# Altium PCB 矩形板V5.0.pcbdoc (part 2 of 2)
Units mm, origin at the board's own origin, x right, y up, seen from the top; angles counter-clockwise.
Board outline 153.79 x 190.97 mm, 2 copper layers (Top Layer, Bottom Layer); 169 components, 219 nets, 720 pads, 293 vias.
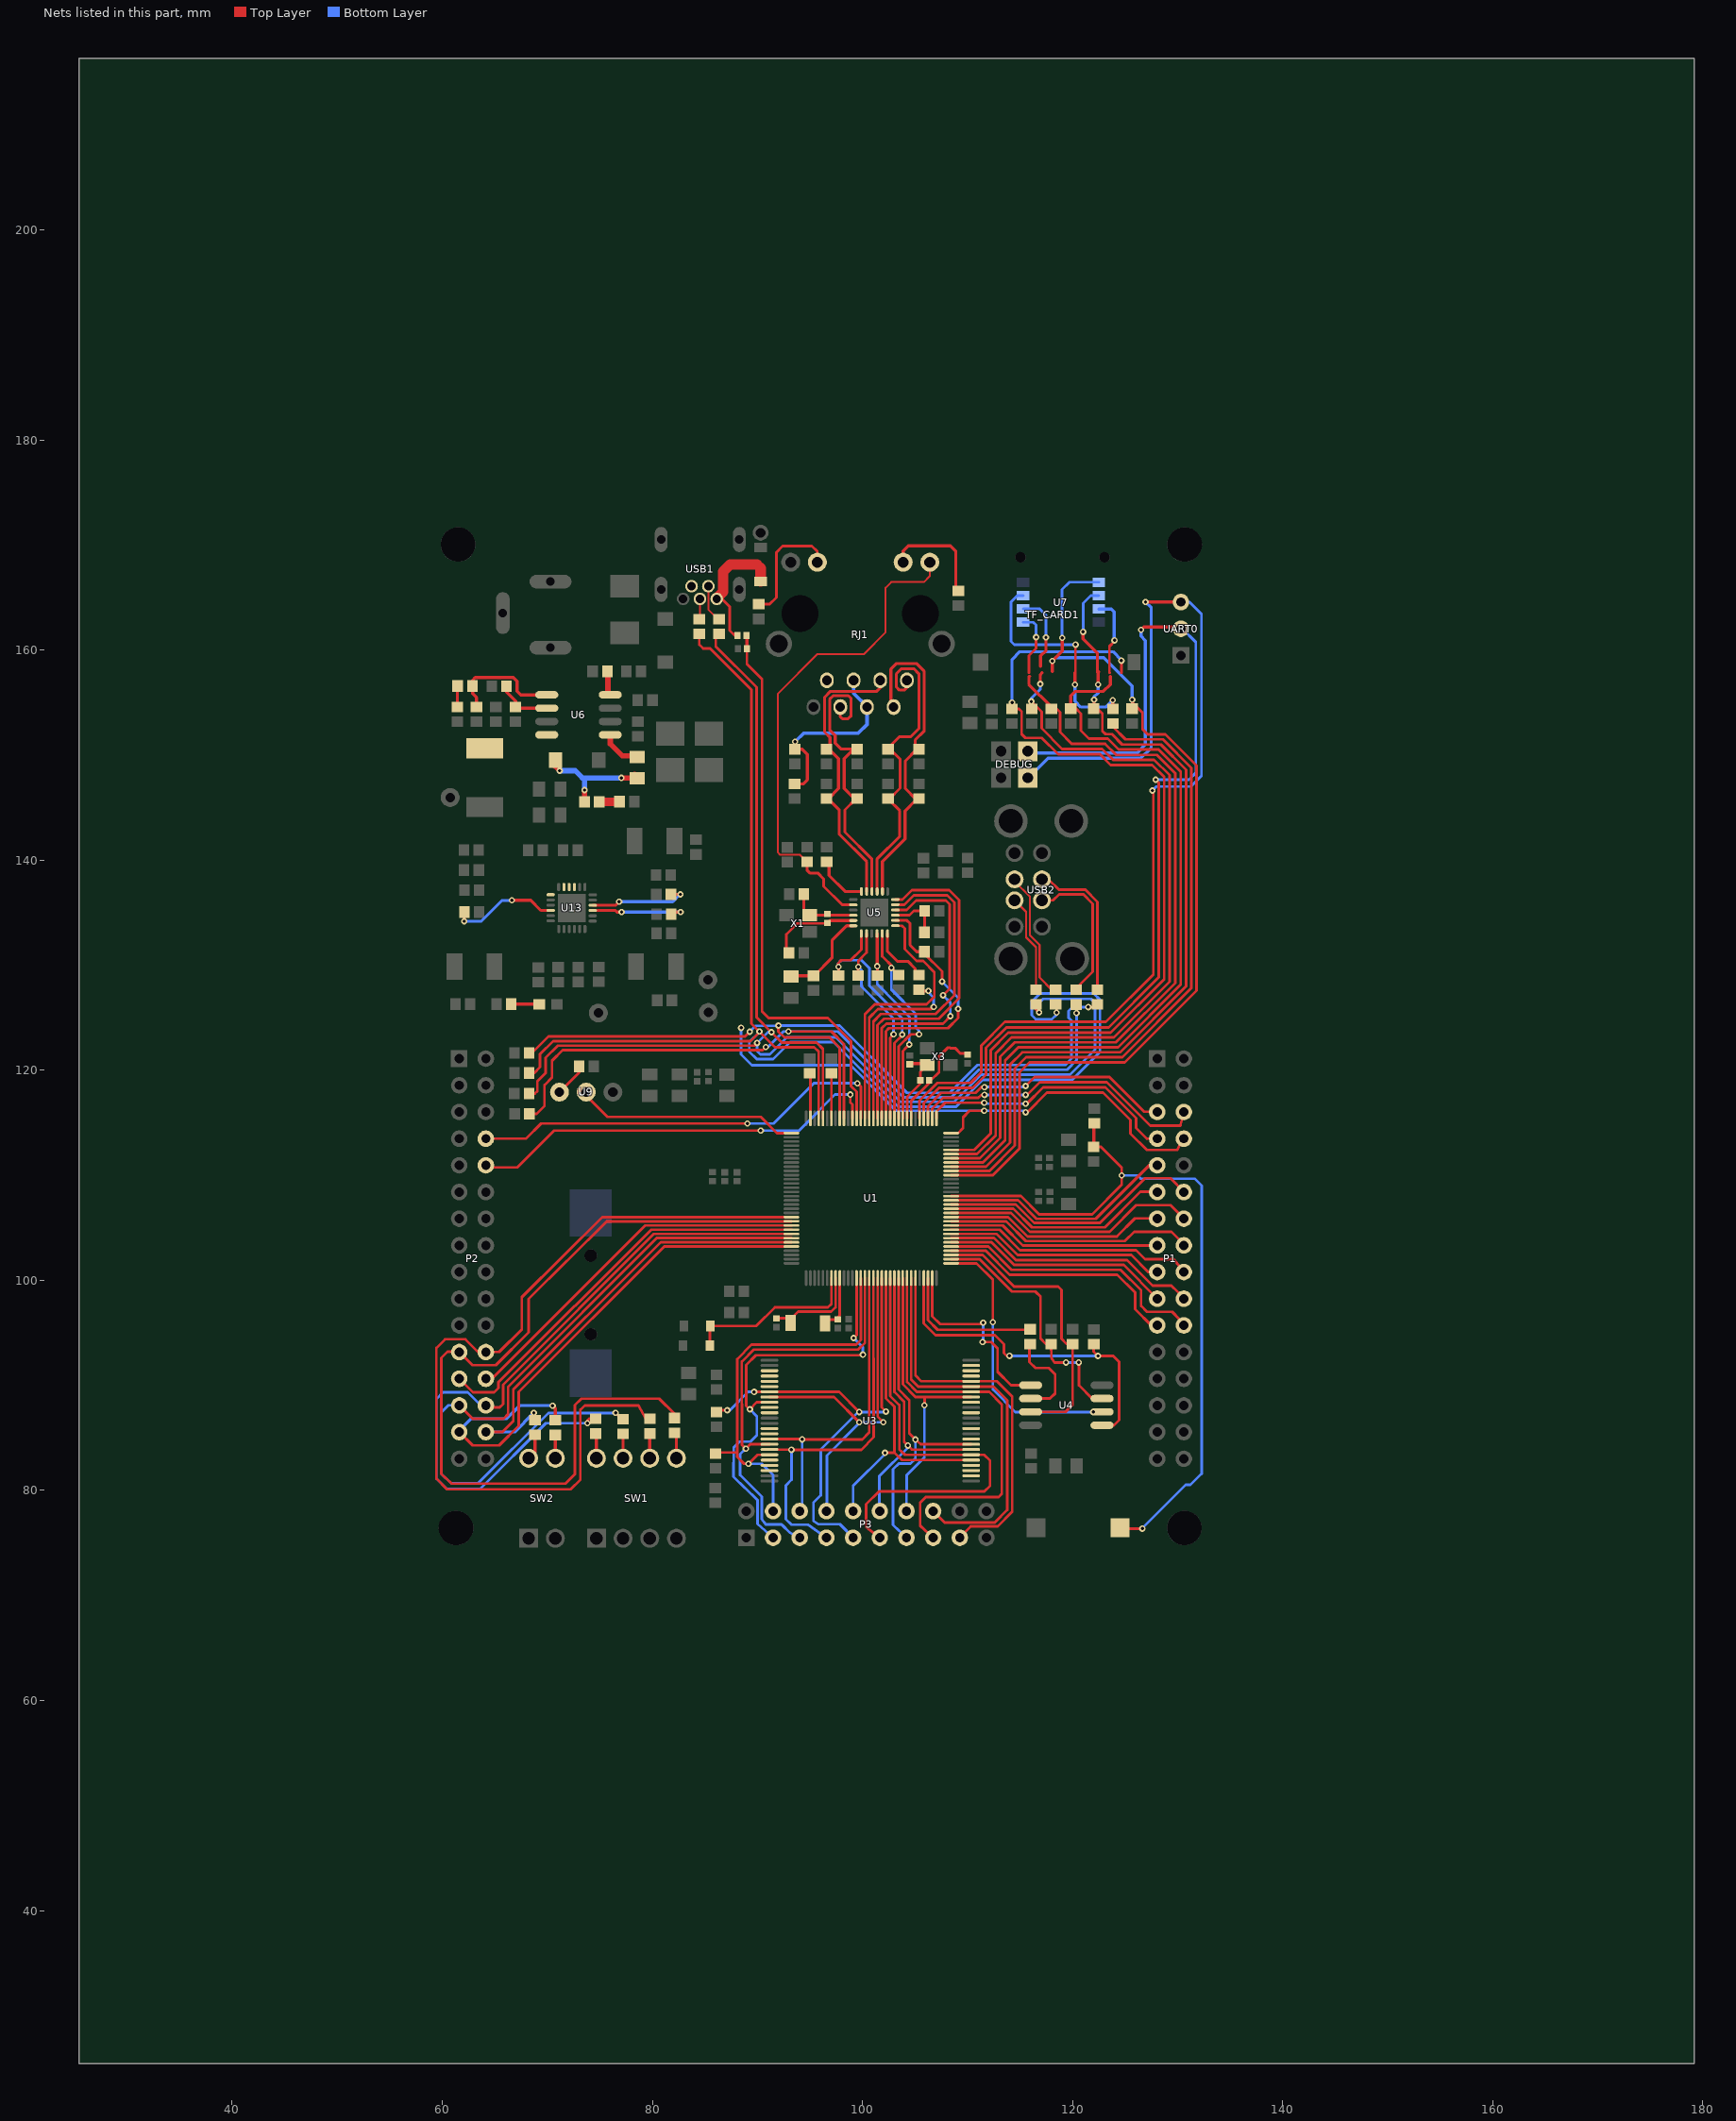
[diagram p2: the nets of this part, all layers, seen from the top]

## Via types
v1: diameter 0.61, hole 0.305, Top Layer to Bottom Layer, 293 vias

## Nets (pads, with @x,y where several pads share a name; then routed paths per layer and width w, separated by ;. In a path a pad name is that pad's centre, name@x,y a point inside that pad or via, vN(x,y) a via of type N, cw(c..) or ccw(c..) an arc to the next point about the centre after c; other vN are vias at no path point) (continued)
PC1: P3.3 U1.45 U3.9 | length 41.5
  Top Layer w0.25: U3.9@91.151,88.389 89.932,88.389 v1(89.287,87.726) 88.941,88.031 88.935,91.939 89.852,92.868 99.98,92.868 v1(100.041,92.929) ; v1(99.161,94.509) 99.443,94.792 U1.45@99.443,100.226
  Bottom Layer w0.25: v1(89.287,87.726) 89.95,87.058 89.95,85.247 89.342,84.64 88.311,84.64 87.74,84.068 87.732,81.305 90.021,79.072 90.021,76.814 P3.3@91.491,75.489 ; v1(99.161,94.509) 100.041,93.629 v1(100.041,92.929)
PC2: P3.4 R29.2 U1.46 U3.19 | length 39.8
  Top Layer w0.25: R29.2@85.896,83.619 88.032,83.619 ; U3.19@91.151,83.389 90.009,83.389 v1(89.149,82.529) 88.73,82.529 88.07,83.19 88.07,92.499 89.442,93.868 99.391,93.868 99.843,94.32 U1.46@99.843,100.225
  Bottom Layer w0.25: v1(89.149,82.529) 90.43,82.529 91.491,81.47 P3.4@91.491,78.029
PC3: P3.5 U1.47 U3.17 | length 41.6
  Top Layer w0.25: v1(88.896,83.964) 88.527,84.333 88.514,92.252 89.67,93.408 99.602,93.408 100.244,94.048 U1.47@100.244,100.225 ; v1(88.896,83.964) 89.321,84.389 U3.17@91.151,84.389
  Bottom Layer w0.25: v1(88.896,83.964) 88.36,83.446 88.36,81.46 90.412,79.408 90.412,77.244 90.795,76.756 92.291,76.758 92.373,76.687 93.061,75.999 93.914,75.488 P3.5@94.031,75.489
PC4: P3.6 U1.48 U3.16 | length 31.4
  Top Layer w0.25: U3.16@91.151,84.889 94.221,84.889 v1(94.251,84.859) ; v1@94.25,84.858 99.98,84.858 100.643,85.521 U1.48@100.643,100.225
  Bottom Layer w0.25: P3.6@94.031,78.029 94.251,78.249 v1(94.251,84.859)
PC5: P3.7 U1.49 U3.18 | length 36.9
  Top Layer w0.25: U3.18@91.151,83.889 93.221,83.889 v1(93.241,83.869) 99.894,83.868 101.06,85.064 U1.49@101.044,100.223
  Bottom Layer w0.25: v1(93.241,83.869) 93.241,81.01 92.7,80.469 92.7,77.269 93.244,76.736 94.809,76.741 P3.7@96.571,75.489
PC6: P3.8 U1.50 U3.8 | length 35.5
  Top Layer w0.25: U3.8@91.151,88.889 97.3,88.889 v1(99.7,86.49) ; U1.50@101.442,100.226 101.442,87.033 v1(101.986,86.49)
  Bottom Layer w0.25: P3.8@96.571,78.029 96.611,78.069 96.611,83.329 99.7,86.418 v1(99.7,86.49) v1(101.986,86.49)
PC7: P3.9 R28.1 U1.51 U3.7 | length 47.3
  Top Layer w0.25: R28.1@86.111,87.444 86.3,87.633 v1(87.127,87.633) ; U3.7@91.151,89.389 97.772,89.389 v1(99.7,87.462) ; U1.51@101.844,100.226 101.844,87.902 v1(102.24,87.506)
  Top Layer w0.3: v1(89.691,89.379) 89.701,89.389 U3.7@91.151,89.389
  Bottom Layer w0.25: v1(87.127,87.633) 87.381,87.633 89.127,89.379 v1(89.691,89.379) ; P3.9@99.111,75.489 97.857,76.779 95.792,76.779 95.332,77.099 95.332,78.818 96.04,79.53 96.04,83.908 99.594,87.462 v1(99.7,87.462) ; v1(99.7,87.462) 102.196,87.462 v1(102.24,87.506)
PC8: P3.10 U1.52 U3.29 | length 32.3
  Top Layer w0.25: v1(102.151,83.579) 103.051,83.579 ; U1.52@102.243,100.225 102.243,88.773 103.051,87.965 103.051,83.578 ; U3.29@110.351,82.89 103.749,82.89 103.051,83.578
  Bottom Layer w0.25: P3.10@99.111,78.029 99.111,80.429 102.151,83.468 v1(102.151,83.579)
PC9: P3.11 U1.53 U3.30 | length 44.5
  Top Layer w0.25: P3.11@101.651,75.489 100.361,76.52 100.361,78.679 101.588,79.908 111.608,79.908 112.152,80.449 112.152,82.829 111.59,83.388 U3.30@110.351,83.389 104.059,83.388 103.511,83.911 103.511,88.14 102.644,88.996 U1.53@102.644,100.225
PC10: P3.12 U1.54 U3.31 | length 30.1
  Top Layer w0.25: U1.54@103.043,100.225 103.043,89.369 103.97,88.44 103.97,84.629 v1(104.331,84.269) 104.711,83.889 U3.31@110.351,83.889
  Bottom Layer w0.25: P3.12@101.651,78.029 101.611,78.069 101.611,81.368 104.331,84.089 v1(104.331,84.269)
PC11: P3.13 U1.55 U3.32 | length 32.9
  Top Layer w0.25: U1.55@103.445,100.225 103.439,89.606 104.461,88.587 104.461,85.419 v1(105.041,84.839) ; v1@105.04,84.838 105.548,84.389 U3.32@110.351,84.389
  Bottom Layer w0.25: P3.13@104.191,75.489 102.921,76.728 102.921,82.009 103.47,82.56 104.57,82.56 105.041,83.031 v1(105.041,84.839)
PC12: P3.14 U1.56 U3.41 | length 28.7
  Top Layer w0.25: U1.56@103.843,100.226 103.843,90.094 105.047,88.889 U3.41@110.351,88.889 ; v1(105.901,88.109) 105.912,88.12 105.912,88.889
  Bottom Layer w0.25: P3.14@104.191,78.029 104.212,81.45 105.901,83.139 v1(105.901,88.109)
PC13: P3.15 U1.57 U3.42 | length 40.3
  Top Layer w0.25: U1.57@104.244,100.226 104.244,90.327 105.182,89.389 U3.42@110.351,89.389 ; P3.15@106.731,75.489 105.492,76.639 105.492,78.818 106.028,79.359 112.97,79.359 113.269,79.669 113.272,88.186 112.07,89.39 U3.42@110.351,89.39
PC14: P3.16 U1.58 U3.43 | length 38.1
  Top Layer w0.25: U1.58@104.643,100.226 104.643,90.564 105.318,89.889 U3.43@110.351,89.889 ; P3.16@106.731,78.029 107.831,76.939 112.591,76.939 113.79,78.138 113.79,88.569 112.472,89.888 U3.43@110.351,89.889
PC15: P3.17 U1.59 U3.44 | length 36.3
  Top Layer w0.25: U1.59@105.045,100.225 105.045,90.967 105.623,90.389 U3.44@110.351,90.389 112.82,90.388 114.25,88.961 114.25,77.947 112.871,76.568 110.308,76.568 P3.17@109.231,75.488
PD8: P1.21 U1.68 | length 23.5
  Top Layer w0.254: U1.68@108.441,102.819 111.743,102.819 114.021,100.538 124.25,100.538 125.972,98.844 125.969,97.241 127.511,95.699 P1.21@128.047,95.699
PD9: P1.22 U1.69 | length 26.3
  Top Layer w0.254: U1.69@108.441,103.22 111.982,103.22 114.201,100.998 124.572,100.998 126.531,99.039 126.531,97.548 127.082,97 129.49,97 P1.22@130.711,95.709
PD10: P1.19 U1.70 | length 21.9
  Top Layer w0.254: U1.70@108.441,103.619 112.281,103.619 114.44,101.46 124.88,101.46 P1.19@128.061,98.249
PD11: P1.20 U1.71 | length 24.6
  Top Layer w0.254: U1.71@108.441,104.02 112.52,104.02 114.621,101.92 125.2,101.92 127.62,99.491 129.401,99.489 P1.20@130.711,98.249
PD12: P1.17 U1.72 | length 21.2
  Top Layer w0.254: U1.72@108.441,104.419 112.799,104.399 114.781,102.42 125.588,102.42 127.204,100.789 P1.17@128.171,100.789
PD13: P1.18 U1.73 | length 23.9
  Top Layer w0.254: U1.73@108.441,104.82 113.061,104.82 115.002,102.88 126.051,102.88 126.912,102.019 129.632,102.019 P1.18@130.6,100.789
PD14: P1.15 U1.74 | length 20.4
  Top Layer w0.254: U1.74@108.441,105.219 113.361,105.219 115.261,103.319 P1.15@128.061,103.329
PD15: P1.16 U1.75 | length 24
  Top Layer w0.254: U1.75@108.441,105.62 113.681,105.618 115.56,103.738 124.971,103.738 125.863,104.63 129.424,104.63 P1.16@130.711,103.329
PE10: P2.8 U1.115 | length 41
  Top Layer w0.254: P2.8@64.161,113.499 67.991,113.51 69.41,114.929 v1(89.051,114.929) ; v1(99.521,118.759) 99.84,118.439 U1.115@99.84,115.42
  Bottom Layer w0.254: v1(89.051,114.929) 91.557,114.929 95.387,118.759 v1(99.521,118.759)
PE11: R68.1 R69.2 U1.116 | length 53.6
  Top Layer w0.254: R69.2@89.005,160.139 89.005,158.666 90.44,157.228 90.44,125.608 91.07,124.978 96.701,124.978 98.921,122.758 98.921,118.478 99.442,117.957 U1.116@99.441,115.418
  Top Layer w0.28: R68.1@88.965,161.389 89.005,161.349 R69.2@89.005,160.139
PE12: P2.10 U1.117 | length 40.2
  Top Layer w0.254: P2.10@63.831,110.749 67.14,110.749 70.651,114.259 v1(90.321,114.259) ; v1(98.841,117.689) 98.841,116.94 99.04,116.741 U1.117@99.04,115.42
  Bottom Layer w0.254: v1(90.321,114.259) 93.965,114.259 97.395,117.689 v1(98.841,117.689)
PF7: P1.8 U1.96 | length 56.1
  Top Layer w0.254: U1.96@108.441,114.02 109.101,114.02 109.581,114.498 109.581,115.519 110.201,116.139 v1(111.591,116.139) ; v1@115.54,115.999 115.571,115.968 115.67,115.968 117.57,117.868 122.911,117.868 125.522,115.257 125.52,113.959 127.072,112.41 129.98,112.41 130.473,113.489 P1.8@130.6,113.489
  Bottom Layer w0.25: v1(88.451,124.039) 88.451,121.508 89.48,120.479 98.86,120.479 103.201,116.139 v1(111.591,116.139) 115.401,116.139 v1@115.541,115.999
  other v1: 115.541,115.999
PF8: P1.7 U1.97 | length 25.3
  Top Layer w0.254: U1.97@107.041,115.42 107.041,116.07 107.88,116.909 v1(111.591,116.909) ; v1@115.54,116.819 115.652,116.819 117.191,118.358 123.13,118.358 126.051,115.437 126.051,114.518 127.087,113.482 P1.7@128.07,113.489
  Bottom Layer w0.254: v1(111.591,116.909) 111.681,116.819 v1@115.541,116.819
  other v1: 115.541,116.819
PF9: P1.6 U1.98 | length 28.7
  Top Layer w0.254: U1.98@106.64,115.399 106.64,116.349 107.669,117.378 111.021,117.378 111.302,117.659 v1(111.621,117.659) ; v1@115.54,117.66 115.682,117.66 116.881,118.859 123.272,118.859 127.392,114.739 130.264,114.739 P1.6@130.653,116.067
  Bottom Layer w0.254: v1(111.621,117.659) v1@115.541,117.659
  other v1: 115.541,117.659
PF10: P1.5 U1.99 | length 25.5
  Top Layer w0.254: U1.99@106.241,115.42 106.241,116.58 107.521,117.858 110.8,117.858 111.341,118.399 v1(111.621,118.399) ; v1@115.54,118.498 116.401,119.359 123.511,119.359 126.81,116.06 P1.5@128.06,116.06
  Bottom Layer w0.254: v1(111.621,118.399) 115.441,118.399 v1@115.541,118.499
  other v1: 115.541,118.499
PG0: P2.29 R18.1 U1.28 | length 53.7
  Top Layer w0.254: P2.29@61.621,85.559 62.891,84.289 65.411,84.289 67.28,86.159 67.28,89.38 81.136,103.22 U1.28@93.241,103.22
  Top Layer w0.3: v1(70.501,88.069) 70.751,87.819 R18.1@70.751,86.679
  Bottom Layer w0.3: P2.29@61.291,85.349 62.772,86.829 66.132,86.829 67.384,88.082 v1(70.501,88.069)
PG1: P2.30 R19.1 U1.27 | length 44.4
  Top Layer w0.254: P2.30@64.161,85.559 65.731,85.559 66.762,86.588 66.762,89.621 80.813,103.619 U1.27@93.241,103.619
  Top Layer w0.3: v1(68.711,87.389) 68.711,86.799 R19.1@68.821,86.689
  Bottom Layer w0.3: P2.30@64.161,85.559 66.881,85.559 v1(68.711,87.389)
PG3: P2.27 R61.1 U1.26 | length 69.3
  Top Layer w0.254: P2.27@61.621,88.099 62.891,86.829 65.83,86.829 66.262,87.256 66.259,89.847 80.414,104.02 U1.26@93.241,104.02 ; v1(76.501,87.389) 77.101,86.789 R61.1@77.201,86.789
  Bottom Layer w0.25: P2.27@61.621,88.11 60.6,88.11 59.922,87.429 59.922,81.554 60.839,80.66 63.391,80.66 70.099,87.368 v1@76.5,87.368
PG5: P2.28 R60.1 U1.25 | length 68.7
  Top Layer w0.254: P2.28@63.831,87.889 65.461,87.889 65.792,88.219 65.792,90.058 80.125,104.419 U1.25@93.241,104.419 ; v1(73.811,86.399) 73.811,86.619 74.001,86.809 R60.1@74.591,86.809
  Bottom Layer w0.25: P2.28@63.831,87.889 63.871,87.889 62.431,89.329 60.069,89.329 59.442,88.696 59.442,81.114 60.435,80.129 63.592,80.129 69.861,86.398 v1(73.811,86.399)
PG6: P2.25 U1.24 | length 38.9
  Top Layer w0.254: P2.25@61.621,90.639 62.911,89.349 64.953,89.349 65.332,89.733 65.332,90.302 79.919,104.82 U1.24@93.241,104.82
PG7: P2.26 U1.23 | length 35.1
  Top Layer w0.254: P2.26@64.161,90.639 64.74,90.639 79.322,105.219 U1.23@93.241,105.219
PG8: P2.23 R62.1 U1.22 | length 83.4
  Top Layer w0.254: P2.23@61.621,93.179 62.881,91.92 65.101,91.92 68.22,95.036 68.22,98.221 75.657,105.62 U1.22@93.241,105.62 ; P2.23@61.621,93.2 60.491,93.2 59.922,92.628 59.922,81.579 60.882,80.642 71.74,80.65 72.632,81.541 72.632,88.13 73.241,88.74 80.651,88.74 82.101,87.289 R62.1@82.101,86.889
PG9: P2.24 R63.1 U1.21 | length 83.2
  Top Layer w0.25: P2.24@64.161,93.169 63.429,93.169 62.21,94.389 60.254,94.389 59.442,93.578 59.442,81.117 60.453,80.109 72.231,80.109 73.15,81.028 73.15,87.678 73.561,88.089 78.672,88.089 79.391,86.809 R63.1@79.761,86.809
  Top Layer w0.254: P2.24@64.161,93.179 65.418,93.179 67.575,95.323 67.567,98.389 75.23,106.019 U1.21@93.5,106.019
PG11: P1.13 U1.76 | length 21.1
  Top Layer w0.254: U1.76@108.441,106.019 113.881,106.019 115.72,104.178 124.225,104.178 125.946,105.899 P1.13@128.061,105.899
PG12: P1.14 U1.77 | length 24.5
  Top Layer w0.254: U1.77@108.441,106.42 114.141,106.42 115.941,104.62 123.521,104.62 126.061,107.16 129.34,107.16 P1.14@130.6,105.9
PG13: P1.11 U1.78 | length 21.8
  Top Layer w0.254: U1.78@108.441,106.819 114.359,106.819 116.139,105.039 123.071,105.039 126.47,108.44 P1.11@128.06,108.44
PG14: P1.12 U1.79 | length 25.2
  Top Layer w0.254: U1.79@108.441,107.221 114.58,107.218 116.34,105.458 122.611,105.458 126.894,109.72 129.32,109.72 P1.12@130.6,108.44
PG15: P1.9 U1.80 | length 22.5
  Top Layer w0.254: U1.80@108.441,107.619 114.821,107.619 116.559,105.859 122.21,105.859 127.331,110.98 P1.9@128.06,110.98
R9_2: LED1.1 R9.2 | length 2.7
  Top Layer w0.3: R9.2@66.561,126.299 69.149,126.299 LED1.1@69.228,126.38
R11_2: R11.2 U13.10 | length 9.8
  Top Layer w0.28: U13.10@74.318,135.703 76.495,135.703 v1@76.841,136.049
  Top Layer w0.3: R11.2@81.771,136.448 82.06,136.738 v1@82.67,136.748
  Bottom Layer w0.28: v1(76.841,136.049) 81.941,136.05 82.642,136.748 v1@82.67,136.748
  other v1: 82.671,136.749
R22_1: R22.1 R44.2 | length 2.2
  Top Layer w0.3: R22.1@61.432,154.599 61.432,156.75 R44.2@61.491,156.809
R57_1: C58.2 R57.1 | length 1.8
  Top Layer w0.8: R57.1@75.03,145.559 C58.2@76.81,145.559
R60_2: R60.2 SW1.8 | length 2.4
  Top Layer w0.3: R60.2@74.591,85.409 74.671,85.329 SW1.8@74.671,83.059
R61_2: R61.2 SW1.7 | length 2.3
  Top Layer w0.3: R61.2@77.201,85.389 77.201,83.069 SW1.7@77.211,83.059
R62_2: R62.2 SW1.5 | length 2.5
  Top Layer w0.3: R62.2@82.101,85.489 82.291,85.299 SW1.5@82.291,83.059
R63_2: R63.2 SW1.6 | length 2.4
  Top Layer w0.3: SW1.6@79.751,83.059 79.751,85.399 R63.2@79.761,85.409
R73_2: R73.2 U13.9 | length 9.4
  Top Layer w0.28: U13.9@74.318,135.205 76.495,135.204 76.64,135.059 v1(77.071,135.059)
  Top Layer w0.3: R73.2@81.791,134.869 81.981,135.059 v1(82.691,135.059)
  Bottom Layer w0.28: v1(77.071,135.059) v1(82.691,135.059)
R74_1: R74.1 U13.22 | length 10.3
  Top Layer w0.28: v1@66.63,136.179 68.421,136.179 69.381,135.219 U13.22@70.318,135.22
  Top Layer w0.3: v1(62.091,134.189) R74.1@62.101,135.059
  Bottom Layer w0.28: v1(62.091,134.189) 63.711,134.189 65.701,136.179 v1(66.631,136.179)
RESET: C50.2 R64.1 SW3.2 U1.81 | length 71
  Top Layer w0.254: U1.81@108.441,108.021 115.09,108.021 116.82,106.288 121.862,106.288 124.681,109.107 v1(124.681,109.989) 124.681,110.729 122.703,112.707 R64.1@122.017,112.708 ; SW3.2@124.511,76.429 124.581,76.359 v1(126.641,76.359)
  Top Layer w0.3: R64.1@122.017,112.708 122.017,114.908 C50.2@122.067,114.958
  Bottom Layer w0.25: v1(124.681,109.989) 126.191,109.989 126.501,109.679 131.641,109.679 132.291,109.029 132.291,81.569 132.261,81.569 131.221,80.529 130.771,80.529 126.641,76.399 v1(126.641,76.359)
RJ1_4: C42.1 R17.1 RJ1.4 RJ1.5 | length 18.1
  Top Layer w0.279: C42.1@93.571,150.569 93.591,150.589 v1(93.591,151.279)
  Top Layer w0.3: R17.1@93.541,147.259 94.351,147.259 94.75,147.66 94.75,150.088 94.27,150.568 C42.1@93.571,150.569
  Bottom Layer w0.35: v1@93.589,151.279 94.4,152.09 99.602,152.09 100.425,152.913 100.425,153.444 100.425,154.625 99.155,155.895 RJ1.5@99.155,157.121
RJ1_7: RJ1.7
RJ1_10: R46.2 RJ1.10 | length 10.4
  Top Layer w0.3: RJ1.10@103.876,168.372 103.876,169.433 104.369,169.928 108.39,169.928 108.88,169.44 108.88,165.89 R46.2@109.131,165.639
RJ1_11: R47.2 RJ1.11 | length 11.6
  Top Layer w0.254: R47.2@90.131,164.369 91.161,164.368 91.801,165.008 91.801,169.298 92.411,169.908 95.19,169.908 95.705,169.395 RJ1.11@95.706,168.372
RMIIOREFCLK: C23.2 U1.109 U5.14 | length 28.6
  Top Layer w0.254: U1.109@102.24,115.418 102.241,123.718 102.53,124.01 108.141,124.01 109.111,124.978 v1(109.111,125.859) ; C23.2@105.901,131.279 105.901,131.099 107.58,129.418 v1@107.58,128.44
  Top Layer w0.28: U5.14@103.13,134.264 104.235,134.264 104.522,133.979 104.522,131.93 105.162,131.29 105.7,131.29 C23.2@105.901,131.488
  Bottom Layer w0.254: v1(107.581,128.439) 109.111,126.909 v1(109.111,125.859)
RMIOCRSDV: R36.2 U1.106 U5.11 | length 21.3
  Top Layer w0.254: U5.11@101.885,133.022 101.885,130.844 102.051,130.679 102.751,129.979 v1(102.751,129.749) 102.76,129.749 R36.2@103.451,129.059 ; U1.106@103.442,115.418 103.442,122.27 104.59,123.418 v1(105.391,123.419)
  Bottom Layer w0.254: v1(102.751,129.749) 102.751,127.689 105.071,125.369 105.071,124.069 105.391,123.749 v1(105.391,123.419)
RMIOMDC: U1.114 U5.13 | length 26.2
  Top Layer w0.254: U1.114@100.241,115.418 100.242,125.328 101.181,126.268 106.112,126.268 106.841,127 106.841,129.339 105.781,130.398 105.172,130.398 104.021,131.549 104.021,133.499 103.754,133.764 U5.13@103.13,133.764
RMIOMDIO: R43.1 U1.113 | length 18.9
  Top Layer w0.254: U1.113@100.64,115.418 100.64,124.998 101.461,125.818 106.561,125.818 v1@106.78,126.039 ; R43.1@105.371,127.659 105.481,127.549 v1(106.281,127.549)
  Bottom Layer w0.254: v1(106.281,127.549) 106.211,127.479 106.781,126.909 v1(106.781,126.039)
RMIORXD0: R34.2 U1.108 U5.8 | length 20.2
  Top Layer w0.254: v1(99.601,129.839) 99.602,130.418 100.386,131.203 U5.8@100.387,133.022 ; U1.108@102.642,115.418 102.642,123.1 v1(102.961,123.419)
  Top Layer w0.28: v1(99.601,129.839) 99.601,129.177 R34.2@99.65,129.128
  Bottom Layer w0.254: v1(99.601,129.839) 99.891,129.549 99.891,127.999 102.961,124.929 v1(102.961,123.419)
RMIORXD1: R35.2 U1.107 U5.7 | length 25.1
  Top Layer w0.254: v1(97.711,129.849) 97.731,129.829 R35.2@97.731,129.019 ; v1(97.711,129.849) 97.712,130.2 97.991,130.479 98.862,130.479 99.886,131.503 U5.7@99.886,133.022 ; U1.107@103.04,115.418 103.04,122.579 103.781,123.319 v1(103.781,123.399)
  Bottom Layer w0.254: v1(97.711,129.849) 97.712,130.2 97.991,130.479 99.911,130.479 100.671,129.72 100.671,128.049 103.78,124.94 v1@103.78,123.398
RMIORXER: R37.2 U1.105 U5.10 | length 20.4
  Top Layer w0.254: U1.105@103.84,115.418 103.841,121.829 104.081,122.069 104.081,122.079 v1(104.461,122.459)
  Top Layer w0.28: R37.2@101.171,129.289 R37.2@101.441,129.019 101.441,129.869 v1(101.401,129.909) 101.401,133.006 U5.10@101.385,133.022
  Bottom Layer w0.254: v1(101.401,129.909) 101.401,128.199 103.272,126.328 103.272,126.268 104.491,125.049 104.491,123.888 104.461,123.858 v1(104.461,122.459)
RMIOTXD0: U1.112 U5.17 | length 33.1
  Top Layer w0.254: U1.112@101.041,115.418 101.042,124.64 101.75,125.349 106.96,125.349 108.751,127.139 108.751,135.978 108.08,136.649 104.88,136.649 103.996,135.763 U5.17@103.13,135.763
RMIOTXD1: U1.111 U5.18 | length 33.9
  Top Layer w0.254: U1.111@101.44,115.418 101.441,124.307 102.03,124.899 107.249,124.899 109.2,126.85 109.2,136.199 108.25,137.149 104.702,137.149 103.815,136.263 U5.18@103.13,136.263
RMIOTXEN: U1.110 U5.16 | length 32.5
  Top Layer w0.254: U1.110@101.841,115.418 101.842,124.01 102.271,124.439 107.661,124.439 v1@108.37,125.148 ; U5.16@103.131,135.263 104.225,135.263 105.111,136.149 107.931,136.149 108.291,135.789 108.291,127.759 v1(107.671,127.139)
  Bottom Layer w0.254: v1(107.671,127.139) 108.371,126.439 v1(108.371,125.149)
RTCVD: D4.2 D5.2 U1.39 | length 16.8
  Top Layer w0.25: D5.2@85.471,93.779 85.471,95.599 D4.2@85.531,95.659 ; D4.2@85.53,95.659 89.901,95.659 91.662,97.419 96.719,97.419 97.044,97.741 U1.39@97.044,100.225
RXD0: DEBUG.c U1.100 UART0.2 | length 94.3
  Top Layer w0.254: U1.100@105.842,115.418 105.842,116.87 107.29,118.318 110.491,118.318 111.761,119.588 111.761,122.138 113.711,124.089 123.45,124.089 128.22,128.859 128.22,147.368 v1@127.92,147.668
  Top Layer w0.3: v1(126.531,161.929) 126.801,162.199 130.16,162.199 UART0.2@130.321,162.039
  Bottom Layer w0.254: v1(127.921,147.669) 131.091,147.669 131.741,148.319 131.741,160.769 130.471,162.039 UART0.2@130.321,162.039
  Bottom Layer w0.3: DEBUG.c@115.741,150.379 116.691,150.208 126.15,150.208 126.94,150.997 126.94,160.919 126.531,161.328 v1@126.531,161.93
RXN: C38.1 R40.1 RJ1.6 U5.22 | length 29.4
  Top Layer w0.279: RJ1.6@97.885,154.589 97.885,153.675 98.09,153.469 98.641,153.469 98.921,153.748 98.921,155.389 98.652,155.658 97.222,155.658 96.881,155.318 96.881,152.4 97.41,151.869 97.41,151.14 97.981,150.568 C38.1@99.504,150.569 99.152,150.568 98.26,149.679 98.26,146.829 99.231,145.859 R40.1@99.504,145.859 99.391,145.859 98.321,144.79 98.321,142.679 100.902,140.098 U5.22@100.902,137.022
RXP: C37.1 R38.1 RJ1.3 U5.23 | length 28
  Top Layer w0.279: R38.1@96.571,145.859 R38.1@96.721,145.859 ; U5.23@100.402,137.022 100.402,139.857 97.801,142.458 97.801,144.78 R38.1@96.721,145.859 ; RJ1.3@101.695,157.121 101.695,156.403 101.372,156.077 96.96,156.077 96.401,155.519 96.401,152.209 96.912,151.699 96.912,150.909 C37.1@96.571,150.569 96.83,150.568 97.722,149.679 97.722,146.819 96.762,145.859 R38.1@96.721,145.859
S$12: 
S$14: 
S$19: 
S$28: 
S$30: 
S$44: 
S$47: 
S$48: 
S$49: 
S$50: 
S$53: 
S$54: 
S$55: 
S$57: 
S$61: 
S$67: 
S$69: 
S$71: 
S$73: 
S$77: 
S$79: 
S$81: 
S$2331: 
SD_CD: R24.1 TF_CARD1.9 U1.92 | length 86.3
  Top Layer w0.254: U1.92@108.44,112.419 110.64,112.417 112.21,113.987 112.21,121.899 113.879,123.568 123.63,123.568 128.72,128.658 128.72,147.929 127.58,149.07 123.62,149.07 122.611,150.078 118.641,150.078 117.072,151.648 115.51,151.648 115.162,151.998 115.162,154.139 114.89,154.409 R24.1@114.24,154.409 ; TF_CARD1.9@124.651,157.849 v1(124.651,158.999)
  Top Layer w0.3: R24.1@114.24,154.409 v1(114.24,155.009)
  Bottom Layer w0.3: v1(114.24,155.009) 114.24,159.118 114.97,159.849 123.852,159.849 124.651,159.05 v1(124.651,158.999)
SD_CLK: R15.1 U1.87 | length 64.8
  Top Layer w0.254: U1.87@108.441,110.421 112.093,110.421 114.501,112.829 114.501,120.159 115.581,121.239 124.74,121.239 131.321,127.82 131.321,148.788 128.601,151.508 125.042,151.508 123.841,152.709 R15.1@123.841,153.019
SD_CLK-P: R15.2 TF_CARD1.5 U7.3 | length 21.8
  Top Layer w0.254: TF_CARD1.5@120.251,157.849 120.271,157.869 120.271,160.269 120.291,160.289 v1(120.291,160.529)
  Top Layer w0.3: v1(120.241,156.719) 120.241,157.839 TF_CARD1.5@120.251,157.849 ; v1(123.831,155.239) 123.831,154.429 R15.2@123.841,154.419
  Bottom Layer w0.254: U7.3@115.301,165.194 114.746,165.194 114.141,164.589 114.141,160.889 114.141,160.839 114.451,160.529 v1(120.291,160.529)
  Bottom Layer w0.3: v1(120.241,156.719) 120.241,155.129 120.791,154.579 123.201,154.579 123.201,154.609 v1(123.831,155.239)
SD_CMD: R72.1 TF_CARD1.3 U1.86 U7.5 | length 89.1
  Top Layer w0.254: U1.86@108.44,110.018 112.418,110.017 114.951,112.55 114.951,119.809 115.901,120.759 124.971,120.759 131.791,127.579 131.791,149.019 128.822,151.988 127.15,151.988 126.661,152.478 126.661,154.059 125.681,155.039 v1(125.681,155.279) 125.681,154.448 R72.1@125.661,154.429
  Top Layer w0.3: 118.08,157.949 v1@118.08,158.968 ; v1@118.081,158.969 119.011,159.899 v1(119.011,161.159)
  Bottom Layer w0.254: v1(119.011,161.159) 119.011,165.779 119.696,166.464 U7.5@122.501,166.464
  Bottom Layer w0.3: v1@118.081,158.969 118.381,159.269 122.991,159.269 125.681,156.579 v1(125.681,155.279)
  other v1: 118.081,158.969
SD_D0: R71.1 TF_CARD1.7 U1.88 U7.6 | length 79.1
  Top Layer w0.254: U1.88@108.44,110.819 111.758,110.817 114.062,113.121 114.062,120.548 115.22,121.709 124.521,121.709 130.821,128.008 130.821,148.61 128.41,151.018 124.732,151.018 123.752,151.998 123.15,151.998 122.84,152.308 122.84,153.959 122.37,154.429 R71.1@122.009,154.429
  Top Layer w0.3: v1(121.011,161.739) 121.011,161.069 122.36,159.72 122.36,157.939 TF_CARD1.7@122.451,157.849 ; R71.1@122.051,154.677 v1(122.051,155.279) ; v1(122.441,156.729) 122.441,157.889 122.5,157.949
  Bottom Layer w0.254: v1(121.011,161.739) 121.011,164.48 121.725,165.194 U7.6@122.5,165.194
  Bottom Layer w0.3: v1(122.051,155.279) 122.051,155.539 122.431,155.919 122.431,156.719 v1(122.441,156.729)
SD_D1: R70.1 TF_CARD1.8 U1.89 U7.7 | length 81.9
  Top Layer w0.25: R70.1@119.811,154.429 119.921,154.429 R70.1@120.331,154.839
  Top Layer w0.254: U1.89@108.44,111.22 111.471,111.219 113.582,113.329 113.582,120.929 114.842,122.189 124.331,122.189 130.3,128.158 130.3,148.419 128.192,150.528 124.382,150.528 123.34,151.569 121.56,151.569 120.8,152.328 120.8,153.949 120.32,154.429 R70.1@119.831,154.429 ; TF_CARD1.8@123.551,157.849 123.511,157.889 123.511,160.359 123.991,160.839 v1(123.991,160.929)
  Top Layer w0.3: R70.1@119.831,154.429 119.83,155.628 120.272,156.07 122.931,156.07 123.592,156.728 123.592,157.472
  Bottom Layer w0.3: U7.7@122.501,163.924 123.591,163.924 123.686,163.924 123.961,163.649 123.961,160.959 v1(123.991,160.929)
SD_D2: R26.1 TF_CARD1.1 U1.90 U7.1 | length 78.3
  Top Layer w0.254: U1.90@108.441,111.62 111.171,111.62 113.122,113.568 113.122,121.279 114.501,122.659 124.13,122.659 129.772,128.3 129.772,148.277 128.032,150.02 124.171,150.02 123.102,151.089 119.922,151.089 118.812,152.199 118.812,154.089 118.492,154.409 R26.1@117.991,154.409 ; TF_CARD1.1@115.851,157.849 115.85,159.468 116.531,160.149 v1(116.531,161.239)
  Top Layer w0.3: 115.931,157.51 115.85,157.429 115.85,156.738 117.991,154.599 R26.1@117.991,154.409
  Bottom Layer w0.254: U7.1@115.301,162.654 116.266,162.654 116.531,162.389 v1(116.531,161.239)
SD_D3: R25.1 TF_CARD1.2 U1.91 U7.2 | length 80.2
  Top Layer w0.254: U1.91@108.441,112.021 110.922,112.021 112.68,113.779 112.68,121.61 114.201,123.129 123.93,123.129 129.231,128.43 129.231,148.099 127.77,149.56 123.869,149.56 122.83,150.599 119.002,150.599 117.051,152.549 117.051,154.15 v1@116.081,155.12 ; v1@116.082,155.119 116.131,155.07 R25.1@116.131,154.419
  Top Layer w0.3: v1(116.931,156.779) 116.931,157.669 117.1,157.838 ; 116.95,158.468 116.95,158.998 116.95,159.448 117.47,159.969 v1(117.471,161.209)
  Bottom Layer w0.254: U7.2@115.301,163.924 116.866,163.924 117.471,163.319 v1(117.471,161.209) ; v1(116.081,155.119) 116.081,155.419 116.931,156.269 v1(116.931,156.779)
SPEED_LED: R48.2 RJ1.9 U5.2 | length 48.2
  Top Layer w0.18: R48.2@94.72,139.849 94.052,140.52 92.162,140.52 91.951,140.728 91.951,155.859 95.71,159.618 100.14,159.618 102.21,161.688 102.21,165.948 102.741,166.479 105.84,166.479 106.416,167.053 RJ1.9@106.416,168.372
  Top Layer w0.28: R48.2@94.72,139.849 94.72,139.049 94.991,138.778 95.751,138.778 96.31,138.219 96.31,137.508 98.067,135.752 U5.2@99.131,135.753
SPI_CLK: R16.2 U1.62 | length 14
  Top Layer w0.254: U1.62@106.241,100.219 106.241,96.219 107.161,95.299 R16.2@115.901,95.299
SPI_CS: R30.1 U1.61 U4.1 | length 33.6
  Top Layer w0.254: U1.61@105.842,100.22 105.842,95.897 106.96,94.78 112.601,94.78 113.46,93.919 113.46,93.078 113.732,92.809 v1(114.001,92.809) ; R30.1@122.02,93.919 122.02,93.2 v1(122.421,92.799) 123.876,92.798 124.43,92.24 124.43,86.7 123.935,86.205 U4.1@122.81,86.205
  Bottom Layer w0.254: v1(114.001,92.809) 114.011,92.799 v1(122.421,92.799)
SPI_D3: R31.1 U1.67 U4.7 | length 27.9
  Top Layer w0.254: U1.67@108.441,102.42 111.44,102.42 114.44,99.418 118.621,99.418 118.961,99.08 118.961,94.439 119.462,93.939 R31.1@120.001,93.939 ; U4.7@116.011,87.474 119.336,87.474 120.001,88.139 R31.1@120.001,93.939
SPI_DI: U1.65 U4.2 | length 26.4
  Top Layer w0.254: U1.65@108.441,101.62 110.861,101.62 112.421,100.061 v1(112.421,96.009) ; v1(121.971,87.459) 122.796,87.459 U4.2@122.811,87.474
  Bottom Layer w0.254: v1(112.421,96.009) 112.421,89.598 114.56,87.459 v1(121.971,87.459)
SPI_DO: U1.63 U4.5 | length 18.4
  Top Layer w0.254: U1.63@106.64,100.219 106.64,96.58 107.391,95.829 111.491,95.829 v1(111.491,95.969) ; v1(111.441,94.129) 112.251,94.129 112.861,93.519 112.861,91.289 114.136,90.014 U4.5@116.011,90.014
  Bottom Layer w0.254: v1(111.441,94.129) 111.491,94.179 v1(111.491,95.969)
SPI_WP: R32.1 U1.66 U4.3 | length 24.3
  Top Layer w0.254: U1.66@108.441,102.021 111.159,102.021 114.24,98.938 116.46,98.938 116.96,98.44 116.96,94.439 117.46,93.939 R32.1@117.961,93.939 117.981,92.619 118.281,92.179 v1(119.381,92.179) ; v1(120.601,92.179) 120.601,89.999 121.856,88.744 U4.3@122.811,88.744
  Bottom Layer w0.254: v1(119.381,92.179) v1(120.601,92.179)
SW2_3: R18.2 SW2.3 | length 2.3
  Top Layer w0.3: R18.2@70.751,85.279 70.751,83.019 SW2.3@70.761,83.009
SW2_4: R19.2 SW2.4 | length 2.5
  Top Layer w0.3: SW2.4@68.221,83.009 68.821,83.609 R19.2@68.821,85.289
TXD0: DEBUG.a U1.101 UART0.3 | length 101.6
  Top Layer w0.254: U1.101@105.441,115.418 105.441,117.109 107.13,118.798 110.3,118.798 111.321,119.819 111.321,122.349 113.572,124.599 123.18,124.599 127.691,129.108 127.691,146.55 v1(127.611,146.629)
  Top Layer w0.3: v1(126.95,164.589) 130.31,164.589 UART0.3@130.321,164.579
  Bottom Layer w0.254: v1(127.611,146.629) 127.991,147.01 131.25,147.01 132.271,148.028 132.271,163.428 131.12,164.579 UART0.3@130.321,164.579
  Bottom Layer w0.3: DEBUG.a@115.741,147.668 115.741,147.8 117.661,149.72 126.49,149.72 127.491,150.718 127.491,164.048 v1(126.95,164.589)
TXN: C36.1 R42.1 RJ1.2 U5.20 | length 31.9
  Top Layer w0.279: U5.20@101.9,136.883 101.9,139.88 104.052,142.029 104.052,144.678 105.07,145.699 R42.1@105.421,145.699 ; RJ1.2@102.965,154.564 102.711,154.818 102.711,158.188 103.252,158.729 105.131,158.729 105.891,157.97 105.891,152.318 105.022,151.45 105.022,150.919 C36.1@105.371,150.569 105.19,150.568 104.072,149.448 104.072,146.829 105.04,145.859 R42.1@105.37,145.859
TXP: C35.1 R41.1 RJ1.1 U5.21 | length 30.8
  Top Layer w0.279: U5.21@101.4,137.022 101.4,140.129 103.551,142.278 103.551,144.708 102.436,145.821 102.436,145.859 102.591,145.859 103.582,146.85 103.582,149.618 102.632,150.568 102.436,150.568 102.436,150.675 103.521,151.759 104.61,151.759 105.37,152.519 105.37,157.759 104.91,158.219 103.701,158.219 103.221,157.739 103.221,156.499 103.531,156.189 103.981,156.189 104.235,156.443 RJ1.1@104.235,157.121
U3_3: U3.3
U3_4: U3.4
U3_5: U3.5
U3_6: U3.6
U3_10: U3.10
U3_11: U3.11
U3_14: U3.14
U3_15: U3.15
U3_20: U3.20
U3_21: U3.21
U3_22: U3.22
U3_26: U3.26
U3_27: U3.27
U3_28: U3.28
U3_33: U3.33
U3_35: U3.35
U3_38: U3.38
U3_40: U3.40
U3_45: U3.45
U3_46: U3.46
U3_47: U3.47
U4_6: R16.1 U4.6 | length 9
  Top Layer w0.254: R16.1@115.901,93.898 115.901,92.23 116.471,91.658 117.741,91.658 118.341,91.059 118.341,89.229 117.856,88.744 U4.6@116.011,88.744
U5_6: C33.1 C34.1 U5.6 | length 8.9
  Top Layer w0.28: C33.1@93.191,128.92 93.272,128.999 95.411,128.999 97.1,130.688 97.1,132.359 98.497,133.753 U5.6@99.131,133.754
U5_12: R43.2 U5.12 | length 5.8
  Top Layer w0.28: U5.12@102.386,133.022 102.385,131.315 103.32,130.378 104.321,130.378 105.012,129.689 105.012,129.418 R43.2@105.37,129.06
U5_15: C43.2 R14.1 U5.15 | length 4.8
  Top Layer w0.254: U5.15@103.13,134.764 104.476,134.764 104.89,135.178 105.921,135.178 C43.2@105.921,133.329
U5_24: R49.2 U5.24 | length 5.1
  Top Layer w0.28: R49.2@96.601,139.839 96.82,139.618 96.82,138.549 98.347,137.022 U5.24@99.901,137.022
U6_1: C59.1 U6.1 | length 3.9
  Top Layer w0.5: U6.1@75.993,151.934 75.993,151.076 76.771,150.299 77.145,149.925 C59.1@78.571,149.925
U6_4: C45.2 U6.4 | length 2.3
  Top Layer w0.5: C45.2@75.771,157.97 75.771,155.966 U6.4@75.992,155.745
U6_5: R44.1 R56.2 U6.5 | length 11.1
  Top Layer w0.3: R44.1@62.891,156.809 62.891,155.849 63.251,155.489 R56.2@63.251,154.599 ; R44.1@62.891,156.809 62.891,157.139 63.14,157.388 66.752,157.388 67.12,157.02 67.12,156.088 67.465,155.745 U6.5@69.947,155.745
U6_6: C53.2 C54.2 U6.6 | length 5.3
  Top Layer w0.3: C53.2@66.101,156.559 66.101,156.029 66.97,155.158 66.97,154.599 67.1,154.47 U6.6@69.947,154.475
U6_8: C59.2 D1.2 L3.1 R57.2 U6.8 | length 11.1
  Top Layer w0.3: L3.1@64.031,150.659 L3.1@64.431,150.659
  Top Layer w0.5: D1.2@70.783,149.519 70.783,148.916 v1(71.181,148.519) ; R57.2@73.541,145.859 73.541,146.669 v1(73.551,146.679) ; v1(77.051,147.839) 77.944,147.839 C59.2@78.302,148.197
  Bottom Layer w0.5: v1(71.181,148.519) 72.651,148.519 73.331,147.839 73.571,147.839 v1(77.051,147.839) ; v1(73.551,146.679) 73.551,147.839
U9_3: R20.1 U9.3 | length 3.2
  Top Layer w0.254: U9.3@71.161,117.919 73.021,119.779 R20.1@73.021,120.359
U13_15: U13.15
U13_16: U13.16
U13_17: U13.17
U13_19: U13.19
USB0_DM: R12.2 R33.2 R53.2 U1.124 | length 129.6
  Top Layer w0.25: R33.2@68.251,117.789 68.822,117.79 69.05,118.018 69.05,118.938 69.851,119.738 69.851,121.208 70.991,122.349 89.721,122.349 v1@89.97,122.598
  Top Layer w0.254: R12.2@86.351,161.539 86.03,161.218 86.03,160.36 89.932,156.458 89.932,125.039 v1@91.331,123.616 ; v1(91.331,123.629) 92.332,122.628 95.642,122.628 96.241,122.029 U1.124@96.241,115.418 ; R53.2@116.521,126.269 116.521,125.799 v1@116.811,125.509
  Bottom Layer w0.254: v1(91.331,123.629) 90.991,123.629 89.97,122.598 89.97,121.828 90.28,121.518 91.171,121.518 91.451,121.78 92.81,123.139 97.481,123.139 103.63,116.989 108.71,116.989 111.301,119.578 119.762,119.578 122.142,121.958 122.142,126.418 121.761,126.799 117.191,126.799 116.81,126.418 v1@116.81,125.509
  other v1: 89.971,122.599 116.811,125.509
USB0_DM_E: R53.1 USB2.2 | length 9.4
  Top Layer w0.2: USB2.2@114.486,136.179 115.591,135.074 115.591,132.649 116.531,131.709 116.531,127.848 116.52,127.848 R53.1@116.521,127.669
  Top Layer w0.254: USB2.2@114.467,136.159 USB2.2@114.486,136.178
  Top Layer w0.4: USB2.2@114.467,136.159 USB2.2@114.486,136.178
USB0_DP: R13.2 R27.2 R54.2 U1.125 | length 136.1
  Top Layer w0.25: R27.2@68.273,119.738 68.751,119.738 69.302,120.289 69.302,121.533 70.546,122.778 89.33,122.778 v1@90.221,123.667
  Top Layer w0.254: R13.2@84.471,161.539 84.471,160.528 84.831,160.169 85.499,160.169 89.442,156.227 89.442,124.439 v1(90.196,123.684) ; v1@90.196,123.685 91.689,122.189 95.411,122.189 95.84,121.76 U1.125@95.839,115.418 ; R54.2@118.401,126.279 118.481,126.199 v1(118.481,125.489)
  Bottom Layer w0.254: v1@90.196,123.685 90.196,123.634 89.221,122.659 89.221,121.79 89.942,121.069 91.501,121.069 93.102,122.669 97.26,122.669 103.391,116.54 108.911,116.54 111.461,119.09 119.96,119.09 122.611,121.739 122.611,126.7 122.002,127.309 116.901,127.309 116.112,126.52 116.112,125.229 116.51,124.828 118.022,124.828 118.481,125.288 v1(118.481,125.489)
USB0_DP_E: R54.1 USB2.3 | length 12.4
  Top Layer w0.2: USB2.3@114.486,138.181 114.486,137.983 115.952,136.519 115.952,132.839 116.861,131.93 116.861,128.828 118.011,127.678 R54.1@118.401,127.679
  Top Layer w0.4: USB2.3@114.456,138.149 USB2.3@114.486,138.18
USB0_ID: U1.1 U9.2 | length 21.3
  Top Layer w0.26: U9.2@73.701,117.919 73.77,117.848 73.78,117.5 75.72,115.559 90.32,115.559 91.86,114.02 U1.1@93.241,114.02
USB0_REXT: R51.2 U1.127 | length 4.4
  Top Layer w0.254: R51.2@94.971,119.71 95.06,119.71 U1.127@95.06,115.42
USB1_1: D6.1 R68.2 USB1.1 | length 12.9
  Top Layer w0.254: USB1.1@86.129,164.881 86.62,164.881 87.371,164.129 87.371,161.869 87.852,161.389 R68.2@88.116,161.389
  Top Layer w1: USB1.1@86.129,164.881 86.129,164.957 86.731,165.559 86.731,167.48 87.41,168.158 89.942,168.158 90.31,167.789 D6.1@90.31,166.54
USB1_2: R12.1 USB1.2 | length 3.6
  Top Layer w0.16: USB1.2@85.331,166.084 85.33,163.869 85.501,163.699 86.261,162.939 R12.1@86.351,162.939
USB1_3: R13.1 USB1.3 | length 2.1
  Top Layer w0.16: R13.1@84.53,162.776 USB1.3@84.53,164.88
USB1_4: USB1.4
USB1_DM: R39.1 R58.2 U1.119 | length 79.7
  Top Layer w0.25: R39.1@68.291,115.859 68.972,115.859 69.731,116.619 69.731,118.6 70.44,119.308 70.44,120.909 71.451,121.92 90.511,121.92 v1(90.801,122.209)
  Top Layer w0.254: v1(92.951,123.699) 97.04,123.699 98.24,122.499 U1.119@98.24,115.418 ; R58.2@120.351,126.259 120.381,126.229 v1(120.381,125.449)
  Bottom Layer w0.254: v1(90.801,122.209) 91.011,122.209 92.501,123.699 v1(92.951,123.699) ; v1@92.952,123.7 97.631,123.7 103.912,117.419 108.461,117.419 111.1,120.058 119.48,120.058 120.381,120.959 v1(120.381,125.449)
USB1_DM_E: R58.1 USB2.6 | length 14.3
  Top Layer w0.254: USB2.6@117.087,136.179 118.149,136.179 118.72,136.748 121.042,136.748 121.931,135.859 121.931,129.369 120.351,127.79 R58.1@120.351,127.66
USB1_DP: R23.1 R59.2 U1.120 | length 78.1
  Top Layer w0.25: R23.1@68.281,121.649 68.53,121.648 70.102,123.218 88.82,123.218 v1(89.271,123.669)
  Top Layer w0.254: v1(92.001,124.259) 92.001,123.679 92.561,123.118 96.871,123.118 97.841,122.148 U1.120@97.841,115.418 ; v1(121.501,126.019) 122.121,126.019 R59.2@122.371,126.269
  Bottom Layer w0.254: v1(89.271,123.669) 89.841,124.239 91.981,124.239 v1(92.001,124.259) ; v1(92.001,124.259) 97.821,124.259 104.232,117.848 108.291,117.848 110.94,120.5 119.292,120.5 119.901,121.109 119.901,124.739 119.64,124.998 119.64,125.658 120,126.019 v1(121.501,126.019)
USB1_DP_E: R59.1 USB2.7 | length 14.5
  Top Layer w0.254: USB2.7@117.087,138.181 117.709,138.181 118.7,137.188 121.219,137.188 122.37,136.039 R59.1@122.371,127.669
USB1_REXT: R52.2 U1.122 | length 4.3
  Top Layer w0.254: U1.122@97.041,115.418 R52.2@97.041,119.713
X2_IN: C47.2 U1.40 X2.1 | length 10.7
  Top Layer w0.25: C47.2@91.801,96.383 93.414,96.382 92.995,95.963 X2.1@93.153,95.963 92.835,95.963 93.892,97.02 97.031,97.02 97.443,97.431 U1.40@97.443,100.225
X2_OUT: C48.2 U1.41 X2.2 | length 5.5
  Top Layer w0.25: X2.2@96.449,95.915 96.449,96.248 97.42,96.248 97.844,96.672 U1.41@97.844,100.225
X_IN: C49.2 R55.1 U1.103 X3.1 | length 10.4
  Top Layer w0.254: U1.103@104.643,115.425 104.643,117.081 106.36,118.798 R55.1@106.361,119.039 106.51,119.039 107.29,119.819 107.29,121.318 108.141,122.168 108.311,122.168 108.37,122.11
  Top Layer w0.28: 108.37,122.11 108.819,122.11 109.342,121.587 C49.2@110.021,121.587
X_OUT: C46.2 R55.2 U1.104 X3.3 | length 7.6
  Top Layer w0.254: U1.104@104.245,115.425 104.245,117.462 105.512,118.729 R55.2@105.512,119.039 ; R55.2@105.512,119.039 105.512,119.851 X3.3@106.171,120.509
  Top Layer w0.28: C46.2@104.501,120.639 106.04,120.639 X3.3@106.171,120.509
XTAL1: C41.2 R50.1 U5.5 X1.1 | length 8.6
  Top Layer w0.24: 92.757,132.936 93.788,133.968 95.926,133.968 96.611,133.968 R50.1@96.667,134.023
  Top Layer w0.28: 92.757,132.938 92.757,131.549 C41.2@92.969,131.337 ; R50.1@96.667,134.023 96.898,134.254 U5.5@99.131,134.254
XTAL2: C40.1 R50.2 U5.4 X1.3 | length 6.5
  Top Layer w0.24: X1.3@94.961,134.769 96.025,134.769 96.564,134.769 R50.2@96.667,134.872
  Top Layer w0.28: C40.1@94.421,136.769 94.421,135.309 X1.3@94.961,134.769 ; R50.2@96.667,134.872 96.784,134.755 U5.4@99.131,134.755
pads on no net: B1.0 RJ1.15 RJ1.16 TF_CARD1.

## Polygon pours and split planes (outlines as drawn)
GND on Bottom Layer (solid): 38.14,203.408 153.96,203.668 154.22,54.308 38.14,54.828 38.1,203.368
GND on Top Layer (solid): 50.407,187.2 166.227,187.46 166.487,38.1 50.407,38.62 50.367,187.16

## Other copper
Top Layer:
  rectangle net DCIN: 74.761,152.539 84.621,153.909
  rectangle net DCIN: 80.211,150.859 86.781,155.329
  rectangle net DCIN: 67.911,159.419 82.601,161.729
  rectangle net U6_8: 62.211,148.264 71.501,152.329
  rectangle net +5V: 62.111,143.159 69.961,147.629
  rectangle net LX3: 65.171,132.429 70.751,134.419
  rectangle net LX2: 73.896,130.559 75.826,134.399
  rectangle net LX1: 73.901,136.509 75.811,140.669
  rectangle net DCIN: 79.691,153.829 82.621,159.609
  rectangle net +5V: 62.801,134.439 64.706,143.469
  rectangle net LX2: 73.901,130.469 79.201,131.879
  rectangle net LX3: 64.131,127.869 65.801,134.029
  rectangle net LX1: 73.901,140.509 79.111,141.859
  rectangle net 3.3V: 62.011,125.379 63.581,131.209
  rectangle net DCIN: 66.841,159.419 72.991,161.729
  rectangle net 3.3V: 60.321,128.509 63.581,131.214

## Silkscreen, mask and mechanical layers (free items; w line width, h text height)
Top Overlay:
  text "G  R  T" at 133.165,158.952 h1.2 r90
  text "3V3          RXD / GND          TXD" at 109.49,149.592 h0.8
  text "Galaxy NUC980DK61 Dev Board 5.0(201907)" at 59.982,103.181 h1.5 r90
  text "BOOT1 / BOOT0" at 69.213,88.509 h1.4 r90
  text "PG5(UART0MSG) / PG3(WTD) / PG8 / PG9" at 75.65,87.967 h1.4 r90

## Text inside footprints (layer, text, board x,y; h text height)
DEBUG: Document "2" at 111.681,147.584 h1.02; Document "4" at 111.532,150.071 h1.02 r324; Document "1" at 117.801,147.324 h1.02; Document "3" at 117.991,149.964 h1.02
SW1: Top Overlay "ON" at 73.274,81.521 h0.5; Top Overlay "1" at 74.544,76.941 h0.5 r180; Top Overlay "2" at 77.084,76.959 h0.5 r180; Top Overlay "3" at 79.624,76.959 h0.5 r180; Top Overlay "4" at 82.18,76.896 h0.5 r145
SW2: Top Overlay "ON" at 66.824,81.521 h0.5; Top Overlay "1" at 68.094,76.941 h0.5 r180; Top Overlay "2" at 70.634,76.959 h0.5 r180